# EAGLE board Bottom_PCB_v88 (EAGLE 9.7.0)
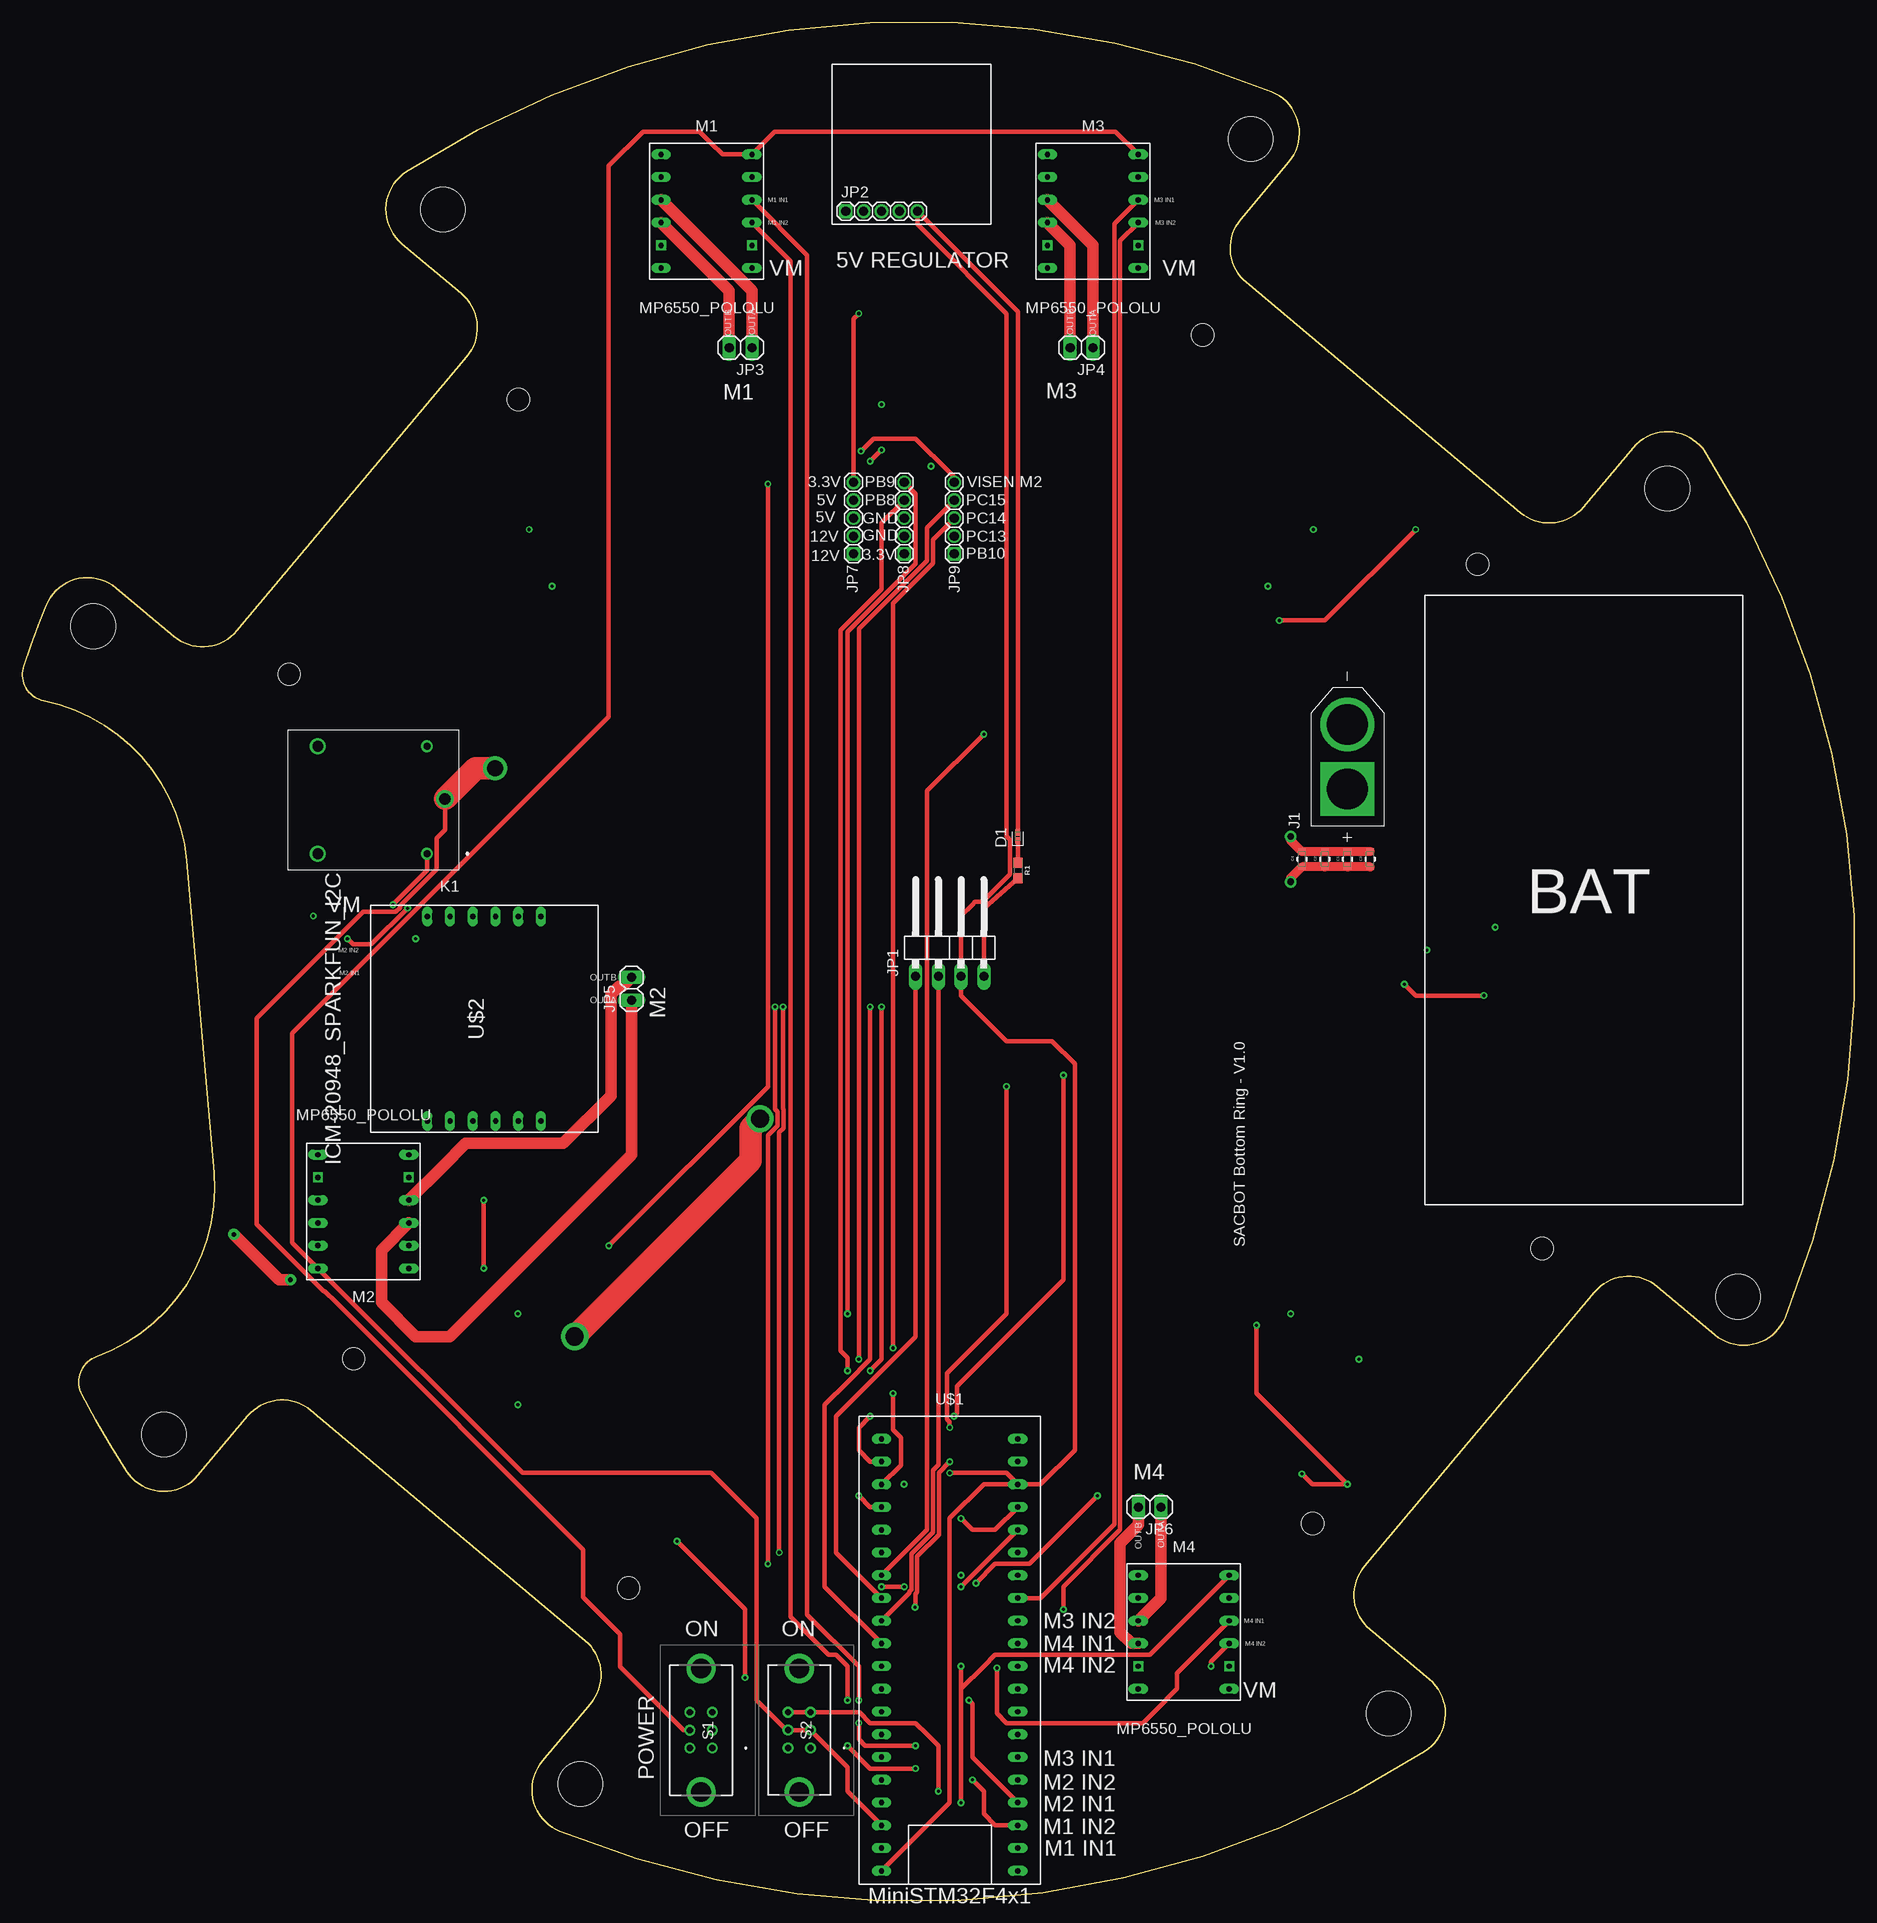
[diagram p0: board, top side]
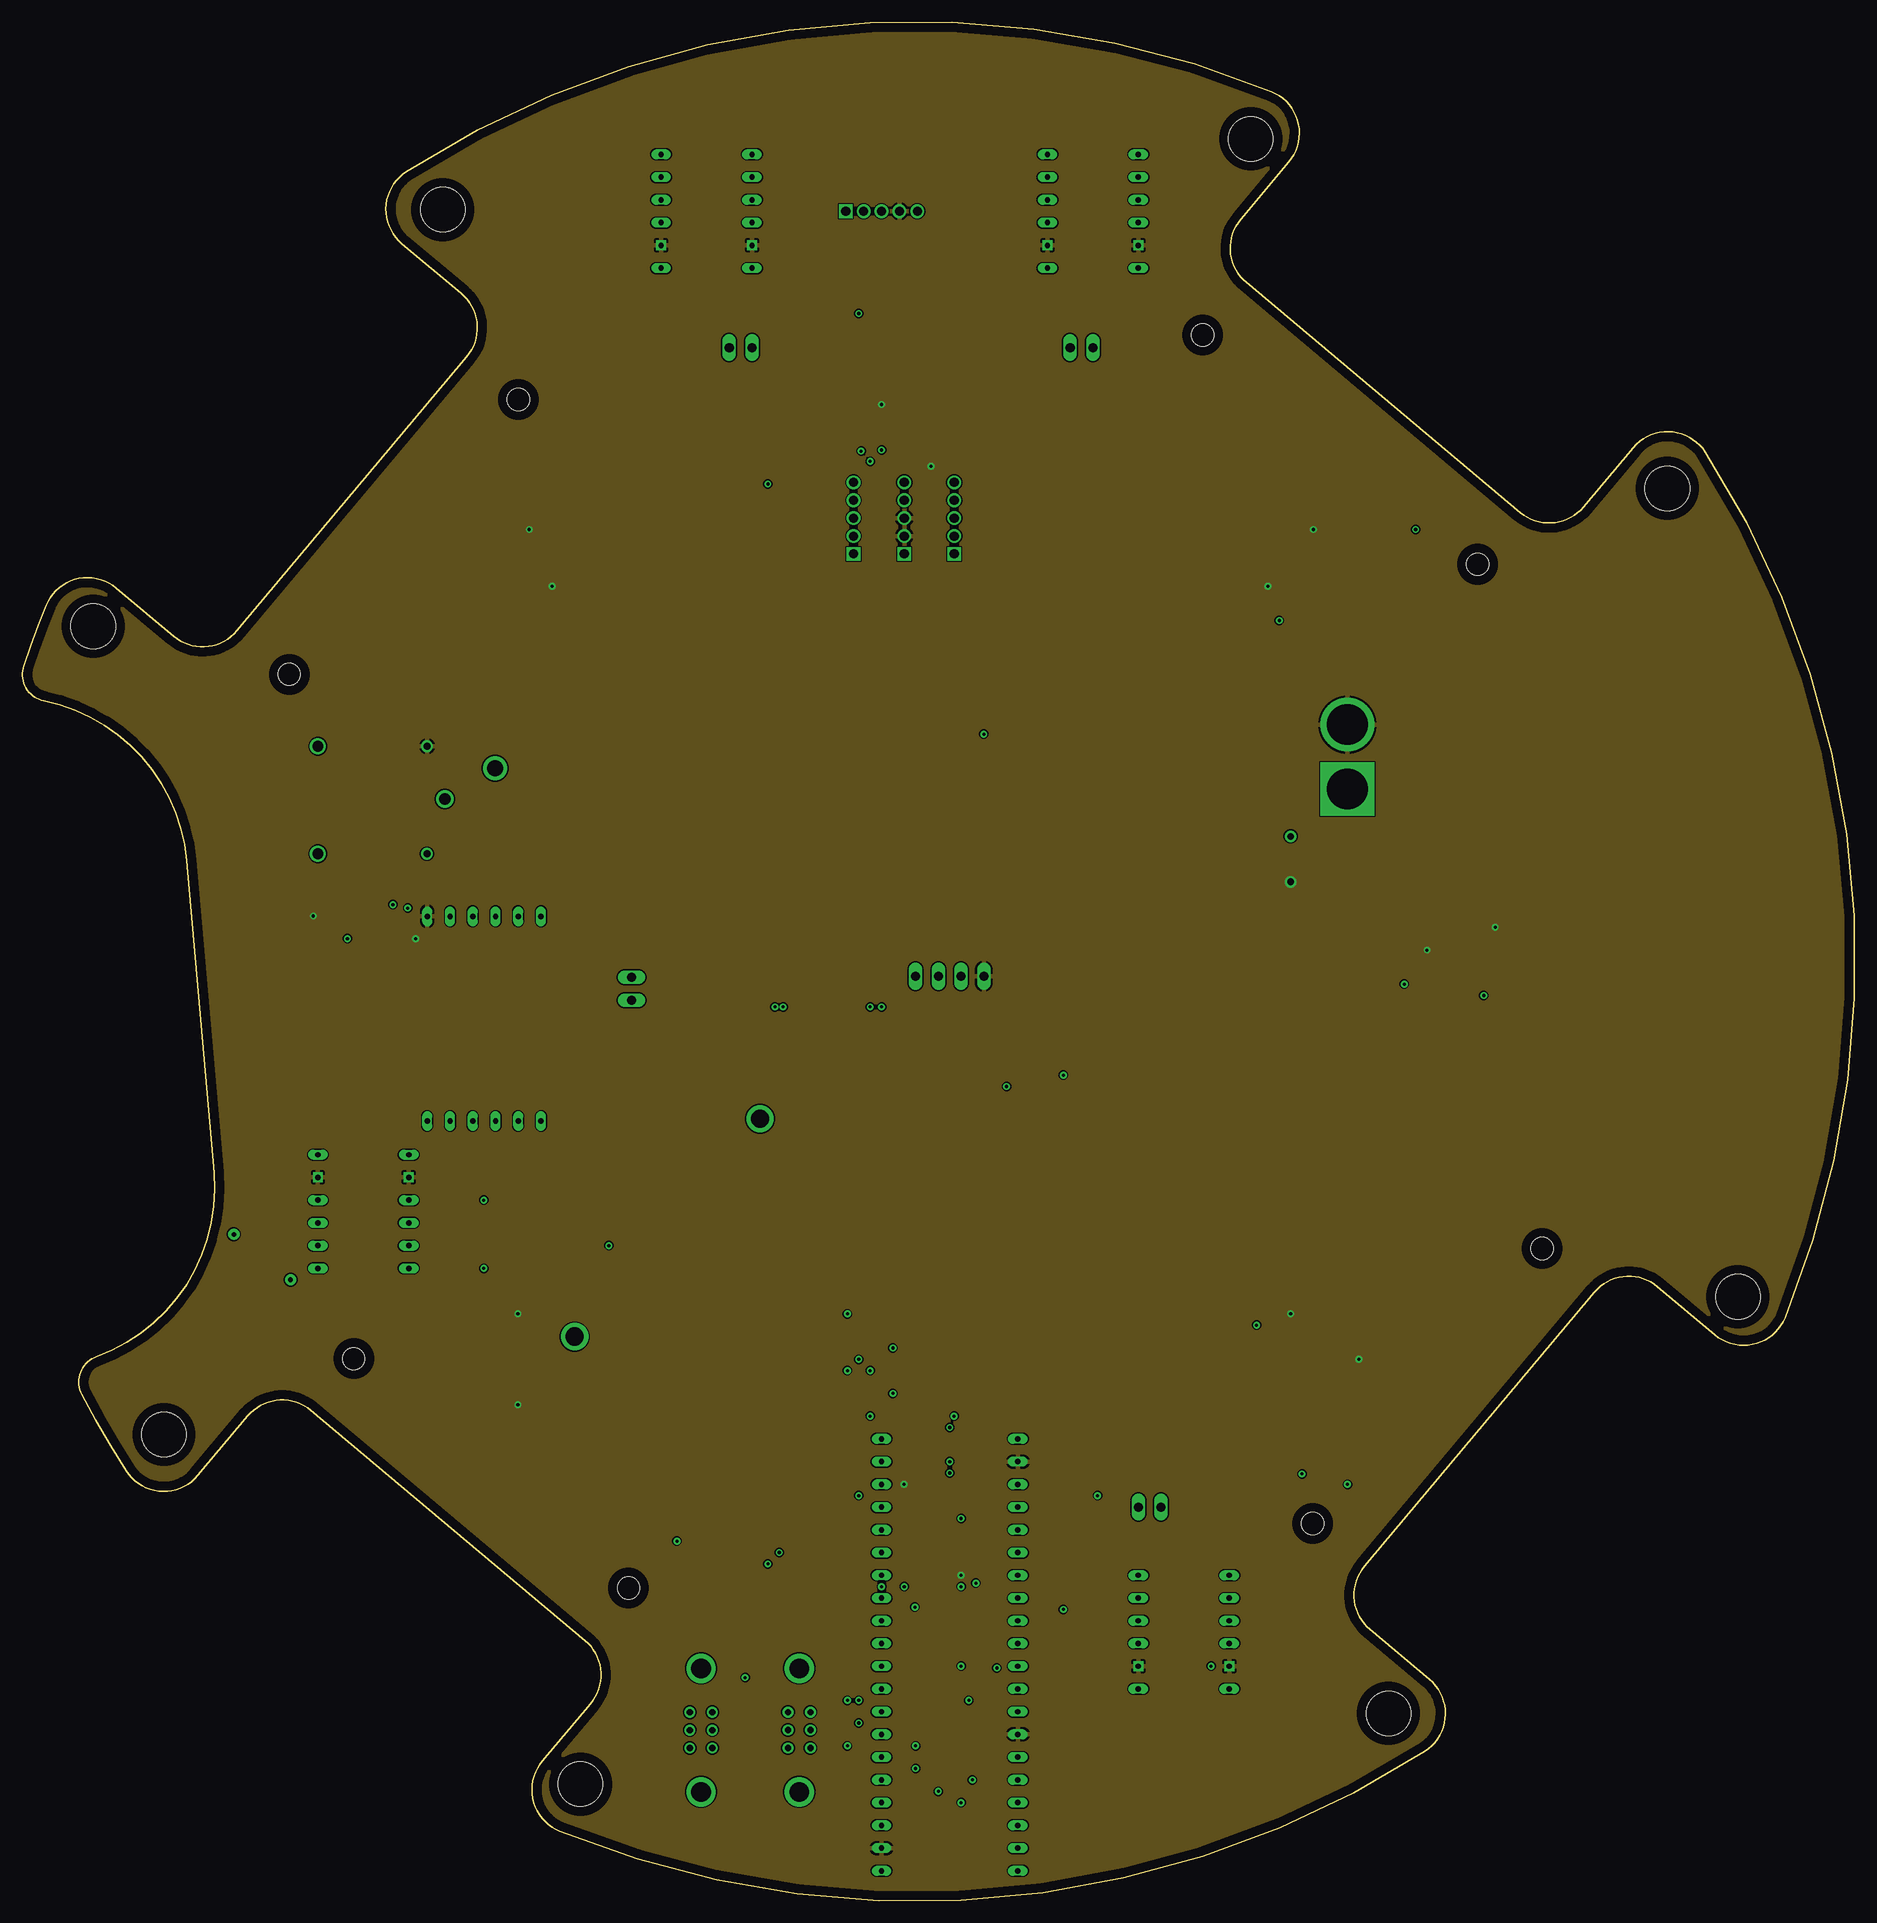
[diagram p1: board, inner layer Route2]
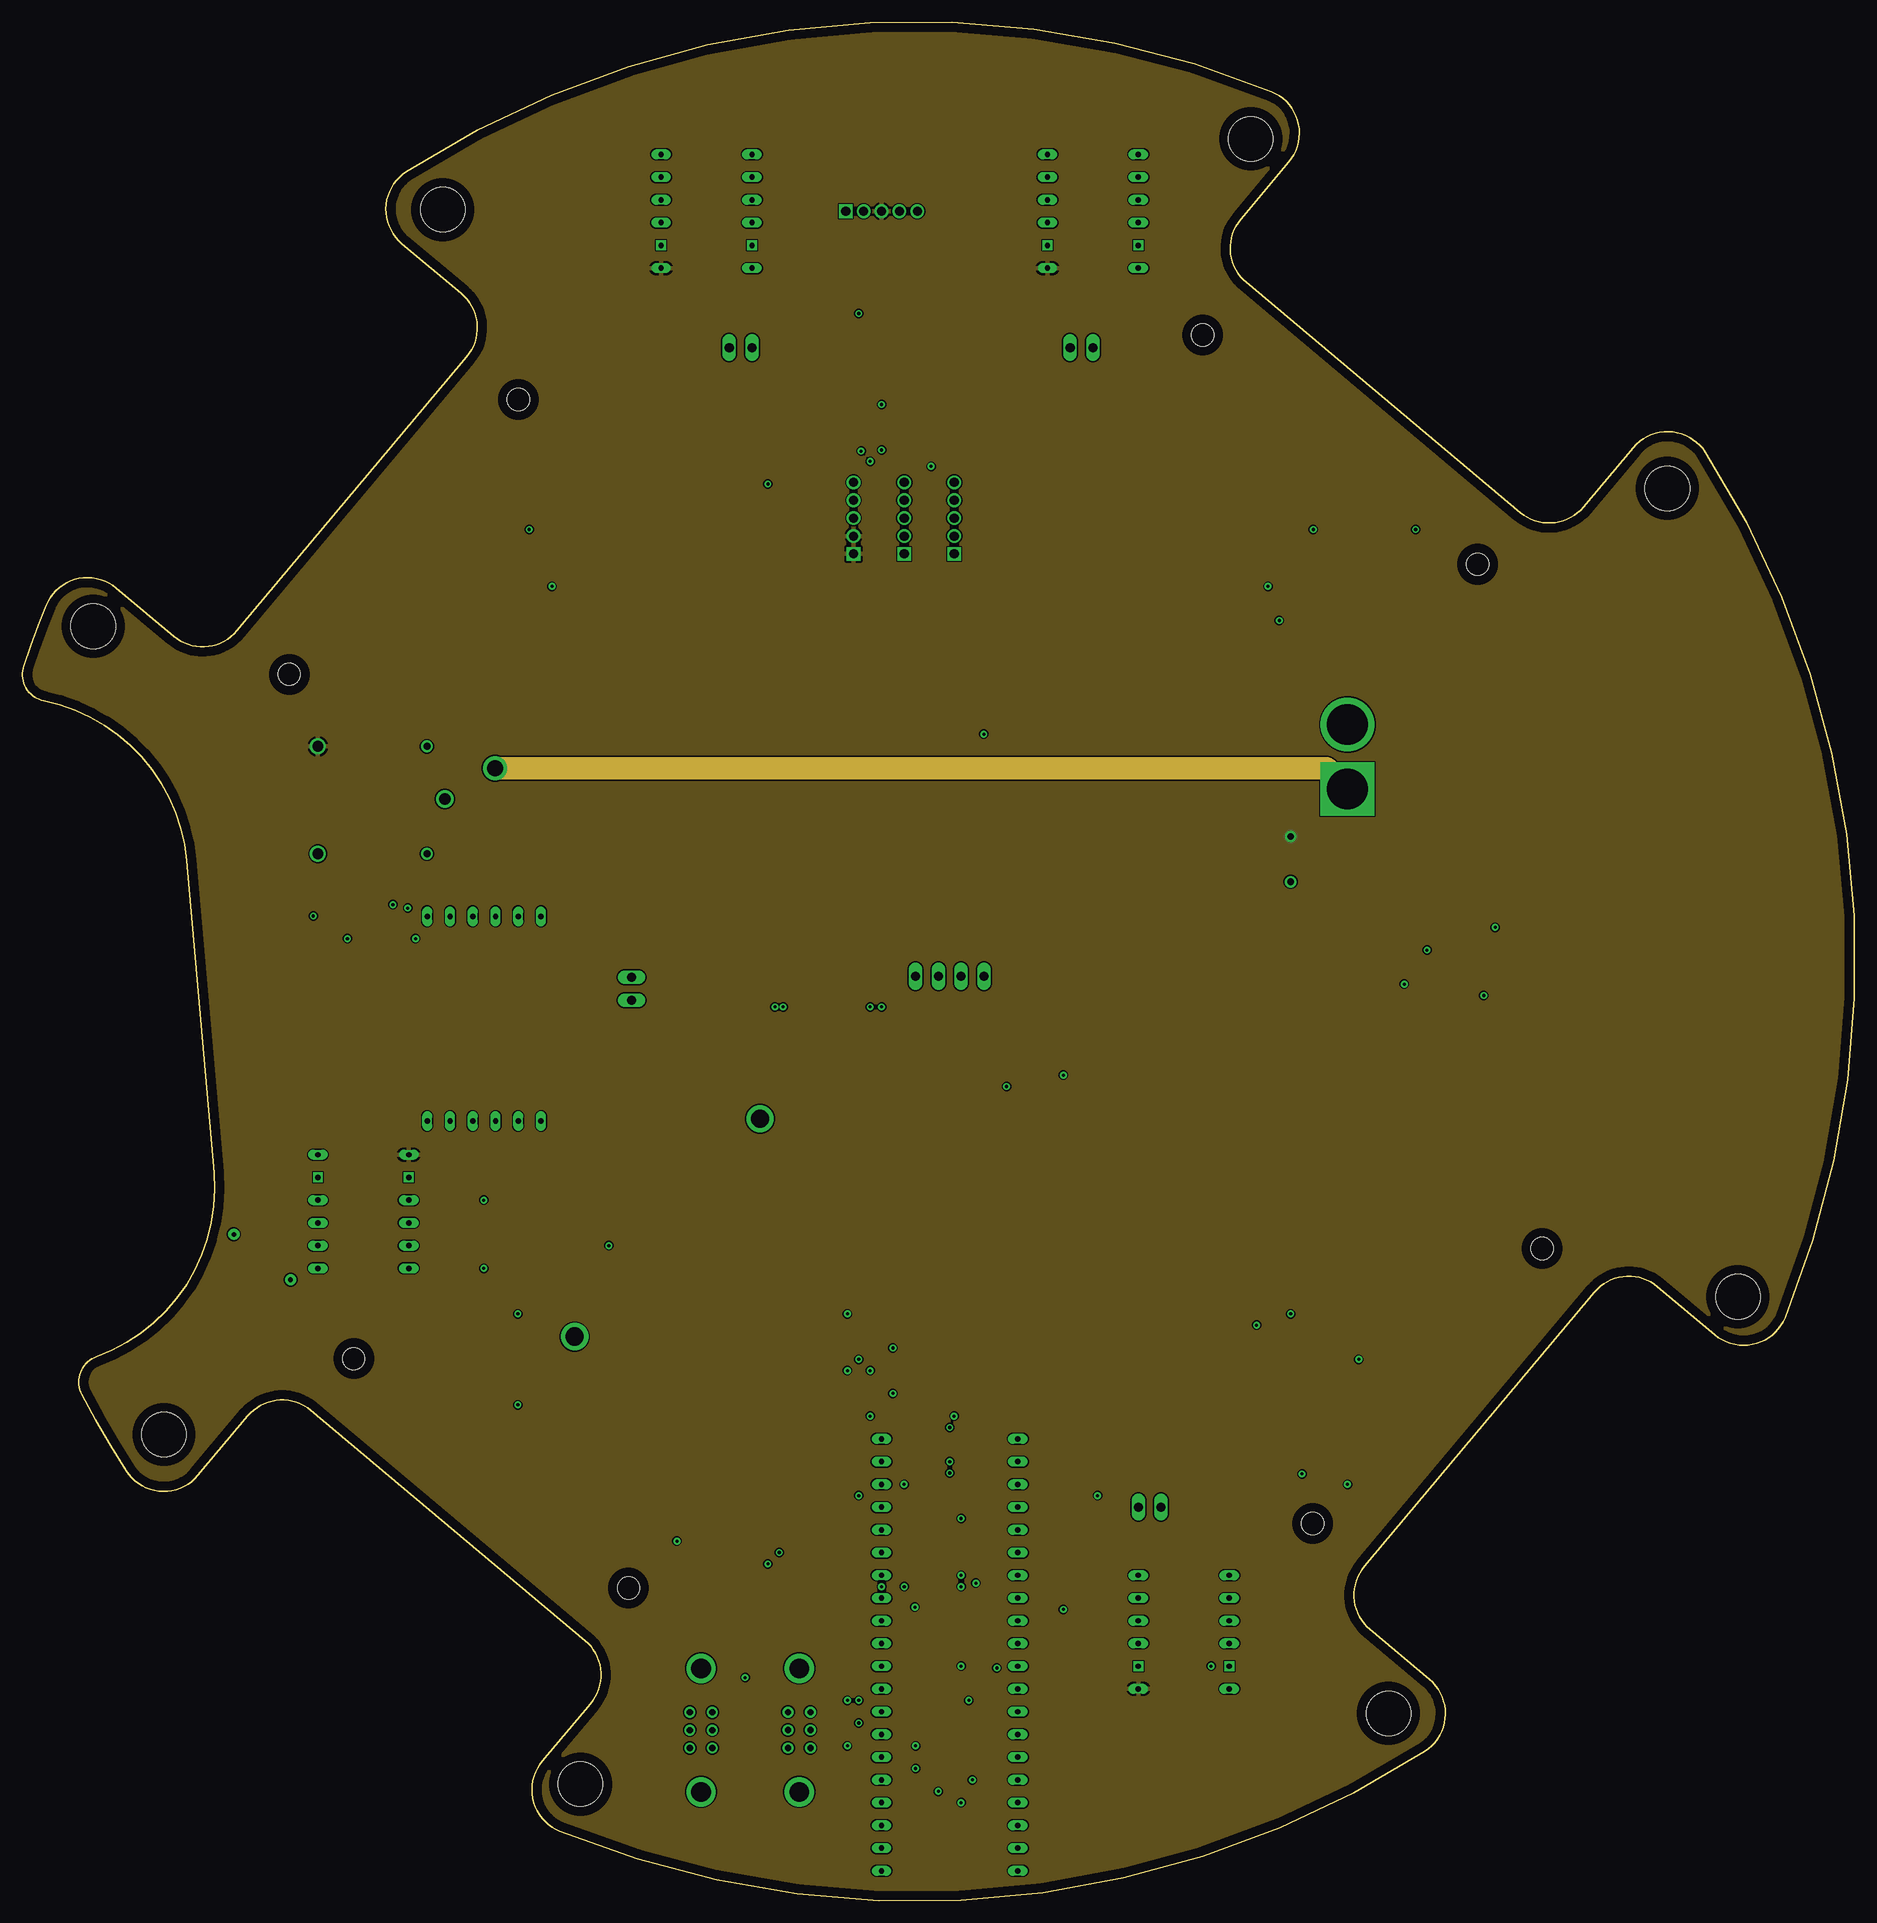
[diagram p2: board, inner layer Route15]
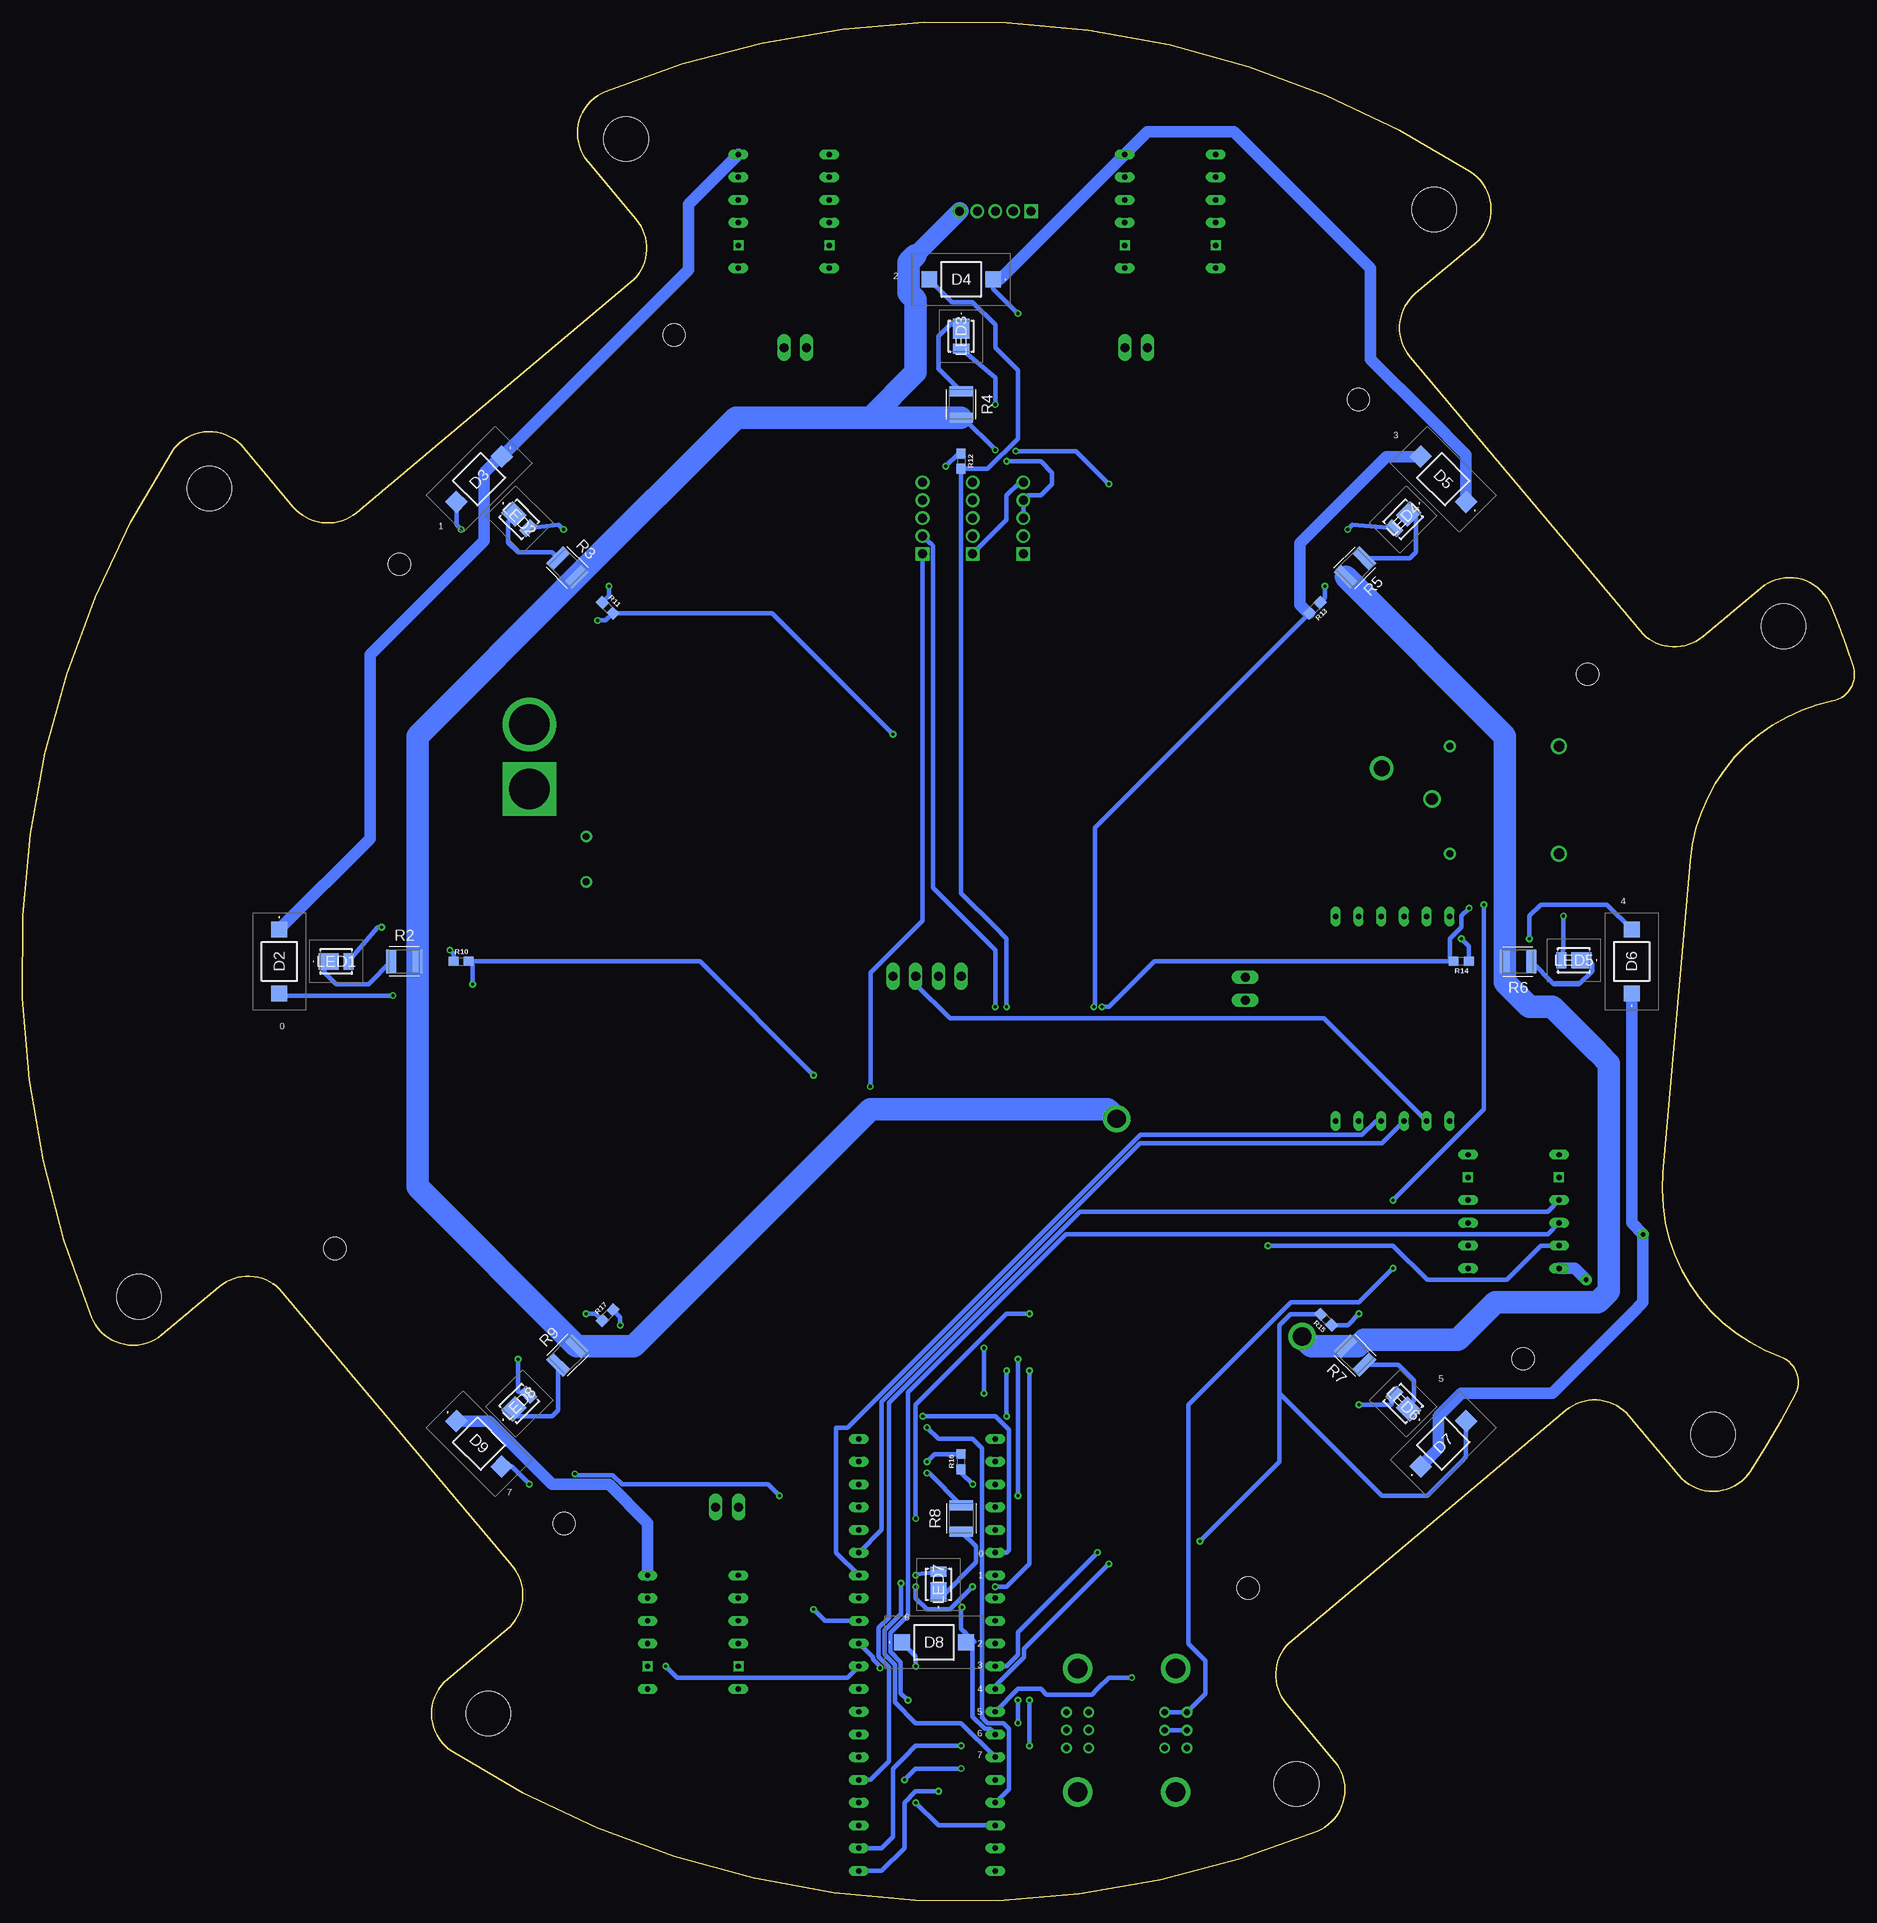
[diagram p3: board, bottom side, seen from below]

Size 204.75 x 209.84 mm. Coordinates in mm from the lower left corner, seen from the top.
Outline: 18.36,116.18 21.41,81.32 arc-75 8.27,60.76 arc98 6.63,56.56 arc5 11.59,48.01 arc107 19.62,47.5 25.2,54.15 arc-90 32.24,54.77 62.88,29.05 arc-90 63.5,22.01 58.11,15.59 arc108 60.05,7.75 arc55 156.74,16.68 arc107 157.24,24.71 150.6,30.29 arc-90 149.98,37.33 175.69,67.98 arc-90 182.74,68.59 189.16,63.2 arc108 197,65.14 arc55 188.07,161.83 arc107 180.03,162.34 174.46,155.69 arc-90 167.41,155.08 136.77,180.79 arc-90 136.16,187.83 141.54,194.25 arc108 139.61,202.09 arc55 42.92,193.16 arc107 42.41,185.13 49.06,179.55 arc-90 49.67,172.51 23.96,141.87 arc-90 16.92,141.25 10.5,146.64 arc108 2.65,144.7 arc4 0.15,137.93 arc97 2.4,134.04 arc-74 18.36,116.18
Copper layers (1+2*15+16): Top 0.035mm / dielectric 1.5mm / Route2 0.035mm / dielectric 0.15mm / Route15 0.035mm / dielectric 0.2mm / Bottom 0.035mm
Design rules "default *": minimum track width 6mil, minimum drill 0.35mm, track to track 6mil, track to pad 6mil, pad to pad 6mil, via to via 6mil, smd to smd 6mil, copper to edge 40mil, drill to drill 6mil, minimum pad ring 10mil, minimum via ring 8mil, stop-mask expansion 4mil, vias tented up to drill 0mil, thermal gap 10mil
Holes 2.5 mm at 131.91,174.93 37.03,60.54 169.83,72.84 55.44,167.72 162.63,149.3 67.74,34.91 144.21,42.12 29.82,137
Holes 5 mm at 152.67,20.92 62.37,13.02 7.92,142.38 15.82,52.07 191.73,67.46 183.83,157.77 46.98,188.92 137.28,196.82

## Footprints (pad centres in the part's own frame; a part is rotated, then mirrored left to right if it is on the bottom)
WCAP-CSGP_0603_W = smd 0.7 x 0.8: 1 -0.85,0; 2 0.85,0
LEDC1005X25N_FLAT-G = smd 0.7 x 0.5: A 0.45,0; C -0.45,0
VBPW34S = smd 1.75 x 1.8: 1 -3.575,0; 2 3.575,0
AMASS_XT60-M = drill 4.55 pad 6: N 3.6,0 | drill 4.55 pad 6 square: P -3.6,0
1X04/90 = drill 1.016 long: 1 -3.81,-3.81; 2 -1.27,-3.81; 3 1.27,-3.81; 4 3.81,-3.81
1_05X2MM = drill 1.016 pad 1.3 square: 1 -4,0 | drill 1.016 pad 1.3: 2 -2,0; 3 0,0; 4 2,0; 5 4,0
1X02 = drill 1.016 long: 1 -1.27,0; 2 1.27,0
RELAY_SRD-12VDC-SL-C = drill 0.8: COIL1 -6.1,6; COIL2 -6.1,-6 | drill 1.3: COM -8.1,-0.12 | drill 1.2: NC 6.1,6; NO 6.1,-6
JE2835ARDN0001A0000N0000001 = smd 2.2 x 1.8: 1 -0.845,0 | smd 1.1 x 1.8: 2 1.395,0
MP6550_POLOLU = drill 0.6 long: !SLEEP -5.08,-6.35; IN1 -5.08,-1.27; IN2 -5.08,1.27; ISET 5.08,-3.81; OUT1 5.08,-1.27; OUT2 5.08,1.27; V3P3 5.08,-6.35; VIN 5.08,6.35; VISEN -5.08,-3.81; VM -5.08,6.35 | drill 0.6 square: GND -5.08,3.81; GND_1 5.08,3.81
0603 = smd 1.1 x 1: 1 -0.85,0; 2 0.85,0
RESC3224X71 = smd 1.131 x 2.66: 1 -1.47,0; 2 1.47,0
SSSF021500 = drill 0.7 pad 1.2: 1 0,0; 2 2,0; 3 4,0; 4 0,2.5; 5 2,2.5; 6 4,2.5 | drill 2.19 pad 3.285: MH1 -4.9,1.25; MH2 8.9,1.25
MINISTM32F4X1 = drill 0.6 long: 3V3 7.62,17.78; 3V3_1 -7.62,-25.4; 5V 7.62,22.86; 5V_1 -7.62,-20.32; GND 7.62,20.32; GND_1 -7.62,-22.86; NRST 7.62,-15.24; PA0 7.62,-12.7; PA1 7.62,-10.16; PA2 7.62,-7.62; PA3 7.62,-5.08; PA4 7.62,-2.54; PA5 7.62,0; PA6 7.62,2.54; PA7 7.62,5.08; PA8 -7.62,12.7; PA9 -7.62,10.16; PA10 -7.62,7.62; PA11 -7.62,5.08; PA12 -7.62,2.54; PA15 -7.62,0; PB0 7.62,7.62; PB1 7.62,10.16; PB2 7.62,12.7; PB3 -7.62,-2.54; PB4 -7.62,-5.08; PB5 -7.62,-7.62; PB6 -7.62,-10.16; PB7 -7.62,-12.7; PB8 -7.62,-15.24; PB9 -7.62,-17.78; PB10 7.62,15.24; PB12 -7.62,22.86; PB13 -7.62,20.32; PB14 -7.62,17.78; PB15 -7.62,15.24; PC13 7.62,-22.86; PC14 7.62,-20.32; PC15 7.62,-17.78; VBAT 7.62,-25.4
ICM-20948_SPARKFUN_I2C = drill 0.6 long: ACL 11.43,-5.08; AD0 -11.43,-5.08; ADA 11.43,-2.54; CL -11.43,-2.54; DA -11.43,0; FSNC 11.43,0; GND 11.43,5.08; GND_1 -11.43,5.08; INT 11.43,2.54; NC -11.43,-7.62; VIN 11.43,-7.62; VIN_1 -11.43,2.54

## Placement (x,y rotation side)
C1  100nF  [WCAP-CSGP_0603_W]  148.09,116.35 90 top
C2  100nF  [WCAP-CSGP_0603_W]  145.55,116.35 90 top
C3  100nF  [WCAP-CSGP_0603_W]  150.63,116.35 90 top
C4  100nF  [WCAP-CSGP_0603_W]  143.01,116.35 90 top
D1  LED_GREEN  [LEDC1005X25N_FLAT-G]  111.26,118.89 90 top
D2  VBPW34S  [VBPW34S]  176.03,104.92 270 bottom
D3  VBPW34S  [VBPW34S]  153.71,158.8 225 bottom
D4  VBPW34S  [VBPW34S]  99.83,181.12 180 bottom
D5  VBPW34S  [VBPW34S]  45.95,158.8 135 bottom
D6  VBPW34S  [VBPW34S]  24.9,104.92 90 bottom
D7  VBPW34S  [VBPW34S]  45.95,51.04 45 bottom
D8  VBPW34S  [VBPW34S]  102.87,28.85 0 bottom
D9  VBPW34S  [VBPW34S]  153.71,51.04 315 bottom
J1  XT60-M  [AMASS_XT60-M]  148.09,127.78 90 top
JP1  PINHD-1X4/90  [1X04/90]  103.64,107.08 0 top
JP2  PINHD-1X55X2MM  [1_05X2MM]  96.02,188.74 0 top
JP3  PINHD-1X2  [1X02]  80.27,173.5 180 top
JP4  PINHD-1X2  [1X02]  118.37,173.5 180 top
JP5  PINHD-1X2  [1X02]  68.08,101.87 90 top
JP6  PINHD-1X2  [1X02]  125.99,43.96 180 top
JP7  PINHD-1X55X2MM  [1_05X2MM]  92.88,154.45 90 top
JP8  PINHD-1X55X2MM  [1_05X2MM]  98.56,154.45 90 top
JP9  PINHD-1X55X2MM  [1_05X2MM]  104.15,154.45 90 top
K1  SRD-12VDC-SL-C  [RELAY_SRD-12VDC-SL-C]  39.12,122.95 180 top
LED1  JE2835ARD-N-0001A0000-N0000001  [JE2835ARDN0001A0000N0000001]  169.68,104.92 0 bottom
LED2  JE2835ARD-N-0001A0000-N0000001  [JE2835ARDN0001A0000N0000001]  149.22,154.31 315 bottom
LED3  JE2835ARD-N-0001A0000-N0000001  [JE2835ARDN0001A0000N0000001]  99.83,174.77 270 bottom
LED4  JE2835ARD-N-0001A0000-N0000001  [JE2835ARDN0001A0000N0000001]  50.44,154.31 225 bottom
LED5  JE2835ARD-N-0001A0000-N0000001  [JE2835ARDN0001A0000N0000001]  31.37,105.05 180 bottom
LED6  JE2835ARD-N-0001A0000-N0000001  [JE2835ARDN0001A0000N0000001]  50.44,55.53 135 bottom
LED7  JE2835ARD-N-0001A0000-N0000001  [JE2835ARDN0001A0000N0000001]  102.37,35.32 90 bottom
LED8  JE2835ARD-N-0001A0000-N0000001  [JE2835ARDN0001A0000N0000001]  149.22,55.53 45 bottom
M1  MP6550_POLOLU  [MP6550_POLOLU]  76.46,188.74 180 top
M2  MP6550_POLOLU  [MP6550_POLOLU]  38.11,76.98 0 top
M3  MP6550_POLOLU  [MP6550_POLOLU]  119.64,188.74 180 top
M4  MP6550_POLOLU  [MP6550_POLOLU]  129.8,29.99 180 top
R1  1k  [0603]  111.26,115.08 270 top
R2  20  [RESC3224X71]  162.06,104.92 0 bottom
R3  20  [RESC3224X71]  143.83,148.92 315 bottom
R4  20  [RESC3224X71]  99.83,167.15 270 bottom
R5  20  [RESC3224X71]  55.82,148.92 225 bottom
R6  20  [RESC3224X71]  37.6,104.92 180 bottom
R7  20  [RESC3224X71]  55.82,60.92 135 bottom
R8  20  [RESC3224X71]  99.83,42.69 90 bottom
R9  20  [RESC3224X71]  143.83,60.92 45 bottom
R10  1k  [0603]  155.71,104.92 0 bottom
R11  1k  [0603]  139.34,144.43 315 bottom
R12  1k  [0603]  99.83,160.8 270 bottom
R13  1k  [0603]  60.31,144.43 225 bottom
R14  1k  [0603]  43.95,104.92 180 bottom
R15  1k  [0603]  59.04,64.9 135 bottom
R16  1k  [0603]  99.83,49.04 90 bottom
R17  1k  [0603]  139.34,65.41 45 bottom
S1  SSSF021500  [SSSF021500]  77.09,17.04 90 top
S2  SSSF021500  [SSSF021500]  88.07,17.04 90 top
U$1  MINISTM32F4X1  [MINISTM32F4X1]  103.64,26.18 180 top
U$2  ICM-20948_SPARKFUN_I2C  [ICM-20948_SPARKFUN_I2C]  50.34,98.52 90 top

## Library data of the parts
C1-C4 = Wurth_Capacitors_WCAP-CSGP; CERAMIC-TYPE: X7R Class II; DATASHEET-URL: https://www.we-online.com/redexpert/spec/885012206120?ae; DF: 5%; HEIGHT: 0.8mm; MOUNT: SMT; OPERATING-TEMPERATURE: -55 up to +125 °C; PART-NUMBER: 885012206120; QMIN: -; RISO: 1GOhm; SIZE: 0603; TECHNICAL-REFERENCE: X7R0603104K100DFCT10000; VR: 100V(DC)
D1 = LED; CATEGORY: LED; COLOR: GREEN; DESCRIPTION: CHIP LED FLAT; SUB-CATEGORY: CHIP; TYPE: FLAT_TOP
D2-D9 = VBPW34S; DESCRIPTION: Photodiode PIN Chip 940nm 2-Pin SMD T/R; HEIGHT: 1.4mm; MANUFACTURER_NAME: Vishay; MANUFACTURER_PART_NUMBER: VBPW34S; MOUSER_PART_NUMBER: 782-VBPW34S; MOUSER_PRICE-STOCK: https://www.mouser.co.uk/ProductDetail/Vishay-Semiconductors/VBPW34S?qs=Uj7aA%252BCqp8ZDwjFKEZ8K8A%3D%3D
J1 = XT60-M; AVAILABILITY: Not in stock; CHECK_PRICES: https://www.snapeda.com/parts/XT60-M/AMASS/view-part/?ref=eda; DESCRIPTION: Plug; DC supply; XT60; male; PIN: 2; for cable; soldered; 30A; 500V; MF: AMASS; MP: XT60-M; PACKAGE: Package; PRICE: None; SNAPEDA_LINK: https://www.snapeda.com/parts/XT60-M/AMASS/view-part/?ref=snap
JP1 = Connector; CATEGORY: Headers; DESCRIPTION: Header, Right Angle, 4 Position; MANUFACTURER: Generic; MPN: Generic; OPERATING_TEMPERATURE: Generic; PART_STATUS: Active; PITCH: 0.100" (2.54mm); ROHS_COMPLIANCE: Generic; SERIES: Generic; SUB-CATEGORY: Headers, Male Pins; TYPE: Board to Board or Cable, Unshrouded, Through Hole, Right Angle
JP2 JP7-JP9 = Connector; CATEGORY: Headers; DESCRIPTION: Header, Straight, 5 Position; MANUFACTURER: Generic; MPN: Generic; OPERATING_TEMPERATURE: Generic; PART_STATUS: Active; PITCH: 0.079" (2.00mm); ROHS_COMPLIANCE: Generic; SERIES: Generic; SUB-CATEGORY: Headers, Male Pins; TYPE: Board to Board or Cable, Unshrouded, Through Hole, Straight
JP3-JP6 = Connector; CATEGORY: Headers; DESCRIPTION: Header, Straight, 2 Position; MANUFACTURER: Generic; MPN: Generic; OPERATING_TEMPERATURE: Generic; PART_STATUS: Active; PITCH: 0.100" (2.54mm); ROHS_COMPLIANCE: Generic; SERIES: Generic; SUB-CATEGORY: Headers, Male Pins; TYPE: Board to Board or Cable, Unshrouded, Through Hole, Straight
K1 = SRD-12VDC-SL-C; AVAILABILITY: In Stock; CHECK_PRICES: https://www.snapeda.com/parts/SRD-12VDC-SL-C/Songle+Relay/view-part/?ref=eda; DESCRIPTION: General Purpose Non Latching 12VDC SPDT Through Hole Relays RoHS; MF: Songle Relay; MP: SRD-12VDC-SL-C; PACKAGE: NON STANDARD-5 Songle Relay; PRICE: None; SNAPEDA_LINK: https://www.snapeda.com/parts/SRD-12VDC-SL-C/Songle+Relay/view-part/?ref=snap
LED1-LED8 = JE2835ARD-N-0001A0000-N0000001; DESCRIPTION: LED Lighting Color J Red-Orange 615nm (610nm ~ 620nm) 1411 (3528 Metric); HEIGHT: 0.8mm; MANUFACTURER_NAME: CREE LED; MANUFACTURER_PART_NUMBER: JE2835ARD-N-0001A0000-N0000001; MOUSER_PART_NUMBER: 941-JE2835ARDN01AN; MOUSER_PRICE-STOCK: https://www.mouser.co.uk/ProductDetail/Cree-LED/JE2835ARD-N-0001A0000-N0000001?qs=tlsG%2FOw5FFi%2FF9M49gTwyg%3D%3D
M1-M4 = MP6550_POLOLU
R1 R10-R17 = SparkFun-Resistors; PROD_ID: RES-07856
R2-R9 = Resistor; CATEGORY: Resistor; SUB-CATEGORY: Fixed
S1 S2 = SSSF021500; DESCRIPTION: 8.5(H)mm, 2mm-travel Type Large-size general purpose Type; HEIGHT: 14.5mm; MANUFACTURER_NAME: ALPS Electric; MANUFACTURER_PART_NUMBER: SSSF021500; MOUSER_PART_NUMBER: 688-SSSF021500; MOUSER_PRICE-STOCK: https://www.mouser.co.uk/ProductDetail/Alps-Alpine/SSSF021500?qs=fMKjfF2mFoj202onwSDRyQ%3D%3D
U$1 = MiniSTM32F4x1
U$2 = ICM-20948_SPARKFUN

## Nets
0: D2.2 R10.2 U$1.PA0
1: D3.2 R11.2 U$1.PA1
2: D4.2 R12.2 U$1.PA4
3: D5.2 R13.2 U$1.PA5
4: D6.2 R14.2 U$1.PA6
5: D7.2 R15.2 U$1.PA7
6: D8.2 R16.2 U$1.PB0
7: D9.2 R17.2 U$1.PB1
+3.3V: D2.1 D3.1 D4.1 D5.1 D6.1 D7.1 D8.1 D9.1 JP7.5 JP8.1 M1.!SLEEP M2.!SLEEP M3.!SLEEP M4.!SLEEP S2.2 S2.5 U$1.3V3
+5V: D1.A JP1.3 JP2.5 JP7.3 JP7.4 R2.2 R3.2 R4.2 R5.2 R6.2 R7.2 R8.2 R9.2 U$1.5V U$1.5V_1 U$2.VIN_1
+12V: J1.P K1.COM S1.2 S1.5
EN: JP2.2
GND: C1.1 C2.1 C3.1 C4.1 J1.N JP1.4 JP2.4 JP8.2 JP8.3 K1.COIL2 LED1.2 LED2.2 LED3.2 LED4.2 LED5.2 LED6.2 LED7.2 LED8.2 M1.GND M1.GND_1 M2.GND M2.GND_1 M3.GND M3.GND_1 M4.GND M4.GND_1 R1.2 R10.1 R11.1 R12.1 R13.1 R14.1 R15.1 R16.1 R17.1 U$1.GND U$1.GND_1 U$1.PA10 U$2.GND
IMU_SCL: U$1.PB6 U$2.CL
IMU_SDA: U$1.PB7 U$2.DA
M1_IN1: M1.IN1 U$1.PB13
M1_IN2: M1.IN2 U$1.PB14
M1_OUT1: JP3.1 M1.OUT1
M1_OUT2: JP3.2 M1.OUT2
M2_IN1: M2.IN1 U$1.PB15
M2_IN2: M2.IN2 U$1.PA8
M2_OUT1: JP5.1 M2.OUT1
M2_OUT2: JP5.2 M2.OUT2
M3_IN1: M3.IN1 U$1.PB5
M3_IN2: M3.IN2 U$1.PB4
M3_OUT1: JP4.1 M3.OUT1
M3_OUT2: JP4.2 M3.OUT2
M4_IN1: M4.IN1 U$1.PB3
M4_IN2: M4.IN2 U$1.PA15
M4_OUT1: JP6.1 M4.OUT1
M4_OUT2: JP6.2 M4.OUT2
N$1: D1.C R1.1
N$2: LED1.1 R2.1
N$3: LED2.1 R3.1
N$4: U$2.AD0
N$5: LED3.1 R4.1
N$6: LED4.1 R5.1
N$7: LED5.1 R6.1
N$8: LED6.1 R7.1
N$9: LED7.1 R8.1
N$10: LED8.1 R9.1
PB8: JP8.4 U$1.PB8
PB9: JP8.5 U$1.PB9
PB10: JP9.1 U$1.PB10
PC13: JP9.2 U$1.PC13
PC14: JP9.3 U$1.PC14
PC15: JP9.4 U$1.PC15
PG: JP2.1
RX2: JP1.2 U$1.PA3
SWD: S2.3 S2.6 U$1.PB12
SWP: K1.COIL1 S1.3 S1.6
TX2: JP1.1 U$1.PA2
VCC: C1.2 C2.2 C3.2 C4.2 JP2.3 JP7.1 JP7.2 K1.NO M1.VIN M2.VIN M3.VIN M4.VIN
VISEN_1: JP9.5 M2.VISEN

## Tracks (layer width: path | path; a pad name or v marks a point on that pad's centre or on a via)
0  (via drill 0.35)
  Top 0.508: v163.33,101.11 155.71,101.11 v154.44,102.38 | v116.34,92.22 116.34,69.36 104.42,57.45 104.42,54.42 v104.12,54.12
  Bottom 0.508: D2.2 175.79,101.11 v163.33,101.11 | v154.44,102.38 154.44,104.5 R10.2 129.04,104.92 v116.34,92.22 | U$1.PA0 94.75,38.88 94.5,39.12 94.5,52.61 96.02,54.12 v104.12,54.12
1  (via drill 0.35)
  Top 0.508: v155.71,153.18 145.55,143.02 v140.47,143.02 | U$1.PA1 101.1,41.42 101.1,106.19 101.1,123.97 v107.45,130.32
  Bottom 0.508: D3.2 156.24,153.71 v155.71,153.18 | v140.47,143.02 139.55,143.02 R11.2 120.96,143.83 v107.45,130.32
2  (via drill 0.35)
  Top 0.508: v94.75,99.84 94.75,60.47 92.21,57.93 89.67,55.39 89.67,36.34 89.67,35.07 U$1.PA4
  Bottom 0.508: D4.2 100.86,178.58 98.56,178.58 96.02,176.04 96.02,174.77 96.02,173.5 93.48,170.96 93.48,163.34 96.87,159.95 R12.2 99.83,112.54 96.02,108.73 94.75,107.46 v94.75,99.84
3  (via drill 0.35)
  Top 0.508: v84.59,38.88 84.59,85.83 85.04,86.28 85.04,88.42 85.01,88.45 v85.01,99.84
  Bottom 0.508: v84.59,38.88 93.48,29.99 93.48,27.45 94.75,26.18 U$1.PA5 | v85.01,99.84 84.89,99.96 84.89,119.86 R13.2
  Bottom 1.27: D5.2 52.31,161.33 59.19,154.45 61.98,151.66 61.98,144.8 61.02,143.83 R13.2
4  (via drill 0.35)
  Top 0.508: v36.33,107.46 36.96,106.83 39.01,106.83 v43.06,110.88 | v43.06,110.88 | v83.32,37.61 83.32,85.49 84.38,86.55 84.38,88.15 84.1,88.43 v84.1,99.84
  Bottom 0.508: D6.2 27.67,111.27 35.06,111.27 36.33,110 v36.33,107.46 | v83.32,37.61 92.82,28.11 92.82,27.18 96.02,23.98 U$1.PA6 | v43.06,110.88 43.95,110 43.95,108.73 45.22,107.46 45.22,105.34 R14.2 78.24,104.92 83.32,99.84 v84.1,99.84
5  (via drill 0.35)
  Top 0.508: v73.16,40.15 80.78,32.53 v80.78,24.91
  Bottom 0.508: D7.2 43.42,49.57 43.95,49.04 47.76,45.23 52.84,45.23 64.27,56.66 | 64.27,56.66 64.27,59.2 64.27,64.28 63.05,65.5 R15.2 | 64.27,56.66 64.27,49.04 v73.16,40.15 | v80.78,24.91 83.32,24.91 84.59,23.64 85.22,23.01 88.4,23.01 90.3,23.01 90.94,23.64 93.48,23.64 U$1.PA7
6  (via drill 0.35)
  Top 0.508: v103.64,49.04 102.42,47.82 102.42,40.87 100,38.46 100,34.47 99.83,34.3 99.83,32.85 v99.75,32.77
  Bottom 0.508: D8.2 99.3,29.86 99.83,30.4 | 99.83,30.4 98.36,28.92 98.56,28.72 98.56,20.55 97.18,19.17 96.63,19.17 U$1.PB0 | v103.64,49.04 102.79,49.89 R16.2 | 99.83,30.4 99.83,32.69 v99.75,32.77
7  (via drill 0.35)
  Top 0.508: v137.93,64.28 137.93,56.66 v148.09,46.5 144.17,46.5 v143.01,47.67 | v106.56,35.45 108.72,37.61 112.53,37.61 v120.15,45.23
  Bottom 0.508: R17.2 137.93,65.2 v137.93,64.28 | v148.09,46.5 150.1,48.51 D9.2 | U$1.PB1 99.83,19.83 104.91,19.83 107.24,22.17 107.24,26.36 108.39,27.51 108.39,30.19 106.56,32.02 v106.56,35.45 | v120.15,45.23 121.42,46.5 137.72,46.5 138.77,47.54 142.88,47.54 v143.01,47.67
+3.3V  (via drill 0.35, 0.51 pad 1.27)
  Top 0.508: M3.!SLEEP 122.18,197.63 85.86,197.63 84.08,197.63 M1.!SLEEP 78.24,195.09 76.97,196.36 75.7,197.63 69.35,197.63 65.54,193.82 65.54,132.25 30.18,96.89 30.18,73.48 M2.!SLEEP 55.89,47.77 75.7,47.77 76.97,47.77 82.05,42.69 82.05,22.37 85.37,19.04 S2.5 S2.2 92.21,14.91 92.21,12.21 U$1.3V3 | M4.!SLEEP 125.99,27.45 122.18,27.45 108.72,27.45 107.45,26.18 104.91,23.64 | 104.91,23.64 v104.91,10.94 | v104.91,26.18 104.91,23.64 | JP7.5 92.88,176.71 v93.48,177.31
  Top 1.27: v23.63,74.44 28.71,69.36 v29.98,69.36
  Bottom 0.508: v104.91,10.94 102.37,8.4 U$1.3V3 | D8.1 104.91,27.31 v104.91,26.18 | v93.48,177.31 96.25,180.09 D4.1 | JP8.1 94.75,154.26 94.75,156.99 93.29,158.45 JP7.5
  Bottom 1.27: D5.1 43.42,161.54 47.76,165.88 54.11,172.23 54.11,174.77 54.11,182.39 65.54,193.82 69.35,197.63 76.97,197.63 79,197.63 M1.!SLEEP 95.51,181.12 D4.1 | M3.!SLEEP 130.31,189.5 130.31,182.39 130.31,182.2 D3.1 151.37,161.33 153.17,159.53 153.17,151.91 155.71,149.37 165.87,139.21 165.87,131.59 165.87,118.66 D2.1 | D9.1 152.61,53.57 149.36,50.31 145.55,46.5 139.2,46.5 134.88,42.18 M4.!SLEEP | D6.1 24.9,75.71 v23.63,74.44 23.63,66.82 24.9,65.55 33.79,56.66 37.6,56.66 43.95,56.66 46.49,54.12 46.49,50.5 D7.1 | v29.98,69.36 31.25,70.63 M2.!SLEEP
+5V  (via drill 0.35, 2.03 pad 2.54)
  Top 0.508: U$1.5V 103.64,10.94 103.64,42.69 107.45,46.5 U$1.5V_1 | U$1.5V_1 113.8,46.5 117.61,50.31 117.61,93.49 115.07,96.03 109.99,96.03 104.91,101.11 JP1.3 104.91,110 106.18,111.27 106.48,111.58 107.27,111.58 110.35,114.66 110.35,118.53 109.99,118.89 109.99,176.04 109.99,177.31 101.1,186.2 100.02,187.28 JP2.5 111.26,177.5 D1.A | v103.64,47.77 109.99,47.77 U$1.5V_1 | v94.75,160.8 v96.02,162.07
  Top 2.54: v61.73,63.01 81.39,82.67 81.39,86.29 v82.45,87.35
  Bottom 0.508: U$2.VIN_1 59.28,98.57 101.1,98.57 104.91,102.38 JP1.3 | R8.2 103.44,47.77 v103.64,47.77 | JP7.3 JP7.4 92.34,156.99 90.94,156.99 89.67,158.26 89.67,159.53 90.94,160.8 v94.75,160.8 | v96.02,162.07 99.63,165.68 R4.2
  Bottom 2.032: JP2.5 104.91,183.85
  Bottom 2.54: R4.2 109.99,165.68 | 109.99,165.68 125,165.68 R3.2 160.59,130.09 R2.2 160.59,79.75 R9.2 136.44,61.96 109.99,88.41 83.51,88.41 v82.45,87.35 | v61.73,63.01 60.67,61.96 R7.2 55.52,61.96 54.83,62.64 44.32,62.64 41.41,65.55 40.14,66.82 32.52,66.82 28.71,66.82 27.44,68.09 27.44,93.49 28.71,94.76 33.79,99.84 36.33,99.84 39.07,102.58 R6.2 39.07,130.09 R5.2 | 109.99,165.68 104.91,170.76 104.91,178.84 105.7,179.63 105.7,183.06 104.91,183.85
+12V  (via drill 1.78 pad 2.54)
  Top 0.508: K1.COM 47.22,119.62 46.28,118.68 46.28,115.21 42.19,111.12 42.19,110.95 41.73,110.49 38.08,110.49 26.17,98.57 26.17,75.58 33.65,68.09 33.79,68.09 35.06,66.82 62.68,39.19 62.68,33.87 66.81,29.75 66.81,26.12 73.9,19.04 S1.5
  Top 2.54: K1.COM 50.66,126.51 v52.84,126.51
  Route15 2.54: v52.84,126.51 145.76,126.51 J1.P
  Bottom 0.508: S1.5 S1.2
GND  (via drill 0.35, 0.76 pad 1.27)
  Top 0.508: R1.2 107.45,110.85 JP1.4
  Top 1.016: C3.1 C1.1 C2.1 C4.1 141.74,114.23 v141.74,113.81
  Bottom 0.508: LED4.2 56.11,153.71 v56.65,153.18 | LED3.2 96.02,170.12 v96.02,167.15 | LED2.2 144.81,153.71 v144.28,153.18 | LED1.2 165.02,108.73 v164.6,108.73 | LED8.2 149.36,56.86 v149.36,60.47 | v104.91,36.34 104.82,36.43 LED7.2 | LED6.2 51.77,55.39 v55.38,55.39 | LED5.2 32.52,106.35 v32.52,110 | R15.1 56.63,64.3 v55.38,65.55 | R14.1 43.1,106.61 v43.95,107.46 | R13.1 59.19,145.56 v59.19,146.83 | R11.1 139.2,145.78 v139.2,146.83 | R10.1 156.56,105.77 v156.98,106.19 | R17.1 140.69,65.55 v141.74,65.55 | R16.1 99.83,47.79 v98.53,46.5 | R12.1 100.15,161.65 v101.56,160.25
  pour Route2: -10.41,-9.13 207.52,-9.13 207.52,222.78 -14.21,222.78
IMU_SCL
  Bottom 0.508: U$2.CL 53.51,87.1 55.03,85.58 57.92,85.58 79.8,85.58 109.99,55.39 112.53,52.85 113.8,52.85 113.8,38.88 U$1.PB6
IMU_SDA
  Bottom 0.508: U$1.PB7 108.72,41.42 108.72,55.73 79.84,84.6 52.84,84.6 U$2.DA
M1_IN1  (via drill 0.35)
  Top 0.508: v99.83,17.29 94.19,17.29 93.48,18 93.48,18.56 v93.48,19.83 | v93.48,22.37 93.48,26.18 87.71,31.95 87.71,183.84 M1.IN1
  Bottom 0.508: v99.83,17.29 104.91,17.29 106.18,16.02 107.45,14.75 107.45,7.13 108.72,5.86 U$1.PB13 | v93.48,22.37 v93.48,19.83
M1_IN2  (via drill 0.35)
  Top 0.508: M1.IN2 85.86,183.15 85.86,31.69 90.1,27.45 90.94,27.45 92.21,26.18 v92.21,22.37 | v99.83,14.75 94.75,14.75 v92.21,17.29 | v106.18,13.48 107.45,12.21 107.45,9.67 108.72,8.4 U$1.PB14
  Bottom 0.508: v99.83,14.75 104.91,14.75 v106.18,13.48 | v92.21,22.37 v92.21,17.29
M1_OUT1
  Top 1.27: M1.OUT1 81.54,179.85 JP3.1
M1_OUT2
  Top 1.27: M1.OUT2 79,179.85 JP3.2
M2_IN1  (via drill 0.35)
  Top 0.508: U$1.PB15 106.18,16.02 106.18,21.97 v105.77,22.37
  Bottom 0.508: M2.IN1 34.3,74.44 88.14,74.44 105.77,56.8 105.77,31.87 107.73,29.92 107.73,27.78 106.58,26.64 106.58,23.18 v105.77,22.37
M2_IN2
  Bottom 0.508: U$1.PA8 109.99,13.48 107.91,15.56 107.91,26.09 109.05,27.23 109.05,30.46 107.91,31.61 107.91,55.6 86.53,76.98 34.3,76.98 M2.IN2
M2_OUT1
  Top 1.27: M2.OUT1 40.14,72.66 40.14,68.09 40.14,66.82 43.95,63.01 47.76,63.01 64.5,79.75 68.08,83.33 JP5.1
M2_OUT2
  Top 1.27: M2.OUT2 47,82.06 49.54,84.6 60.46,84.6 65.77,89.91 65.77,101.24 66.67,102.15 67.09,102.15 JP5.2
M3_IN1
  Top 0.508: M3.IN1 122.03,187.32 122.03,42.03 115.07,35.07 113.8,33.8 U$1.PB5
M3_IN2  (via drill 0.35)
  Top 0.508: M3.IN2 122.69,185.44 122.69,135.4 122.69,41.42 116.34,35.07 v116.34,32.53
  Bottom 0.508: v116.34,32.53 115.07,31.26 U$1.PB4
M3_OUT1
  Top 1.27: M3.OUT1 119.64,184.93 JP4.1
M3_OUT2
  Top 1.27: JP4.2 117.1,175.28 117.1,184.93 M3.OUT2
M4_IN1  (via drill 0.35)
  Top 0.508: M4.IN1 129.04,25.42 129.04,23.64 126.5,21.1 125.23,19.83 109.99,19.83 108.91,20.91 v108.91,25.99
  Bottom 0.508: U$1.PB3 109.71,27.17 109.71,26.96 108.91,26.16 v108.91,25.99
M4_IN2  (via drill 0.35)
  Top 0.508: M4.IN2 132.85,26.69 v132.85,26.18
  Bottom 0.508: v132.85,26.18 131.58,24.91 112.53,24.91 U$1.PA15
M4_OUT1
  Top 1.27: M4.OUT1 127.26,33.8 JP6.1
M4_OUT2
  Top 1.27: M4.OUT2 123.96,28.72 122.69,29.99 122.69,39.95 124.72,41.98 JP6.2
N$1
  Top 0.508: D1.C R1.1
N$2
  Bottom 0.508: R2.1 166.07,102.38 169.68,102.38 171.07,103.78 LED1.1
N$3
  Bottom 0.508: R3.1 145.55,150.64 149.36,150.64 150.44,151.73 150.44,154.02 150.21,154.26 LED2.1
N$5
  Bottom 0.508: R4.1 102.37,171.16 102.37,174.77 100.97,176.17 LED3.1
N$6
  Bottom 0.508: R5.1 49.71,149.96 49.03,150.64 49.03,154.88 LED4.1
N$7
  Bottom 0.508: LED5.1 29.84,105.05 29.32,104.65 29.32,103.85 30.79,102.38 32.52,102.38 33.59,102.38 R6.1
N$8
  Bottom 0.508: LED6.1 49.45,55.58 49.21,55.82 49.21,58.12 50.3,59.2 50.98,59.88 R7.1
N$9
  Bottom 0.508: LED7.1 102.17,33.8 98.19,37.78 98.19,39.59 R8.1
N$10
  Bottom 0.508: R9.1 144.87,54.8 145.55,54.12 149.78,54.12 LED8.1
PB8  (via drill 0.35)
  Top 0.508: JP8.4 96.02,153.91 96.02,146.49 91.42,141.9 91.42,61.42 92.21,60.63 v92.21,59.2 | v96.02,35.07 v98.56,35.07 | v104.91,35.07 U$1.PB8
  Bottom 0.508: v92.21,59.2 92.21,38.88 92.21,37.61 94.75,35.07 v96.02,35.07 | v98.56,35.07 101.1,32.53 103.64,32.53 104.91,33.8 v104.91,35.07
PB9  (via drill 0.35)
  Top 0.508: JP8.5 99.83,157.18 99.83,150.64 99.83,149.37 93.48,143.02 92.21,141.75 v92.21,65.55 | v104.91,42.69 106.18,41.42 108.72,41.42 U$1.PB9
  Bottom 0.508: v92.21,65.55 94.75,65.55 99.83,60.47 104.91,55.39 104.91,49.04 v104.91,42.69
PB10  (via drill 0.35)
  Top 0.508: v109.99,90.95 109.99,65.55 103.34,58.9 103.34,53.8 103.64,53.5 v103.64,52.85
  Bottom 0.508: JP9.1 104.15,109.49 109.99,103.65 v109.99,90.95 | v103.64,52.85 102.37,51.58 98.56,51.58 97.53,50.55 97.53,21.1 97.53,20.46 97.16,20.08 96.91,19.83 95.13,19.83 94.5,19.21 94.5,13.48 94.5,12.45 U$1.PB10
PC13  (via drill 0.35)
  Top 0.508: v96.02,99.84 96.02,60.47 v94.75,59.2 | v94.75,54.12 93.48,52.85 93.48,51.58 93.48,50.31 94.75,49.04 U$1.PC13
  Bottom 0.508: JP9.2 103.31,151.62 103.22,151.62 102.98,151.38 102.98,113.15 99.83,110 96.02,106.19 v96.02,99.84 | v94.75,59.2 v94.75,54.12
PC14  (via drill 0.35)
  Top 0.508: v97.29,56.66 97.29,52.85 97.29,52.6 98.18,51.71 98.18,48.66 U$1.PC14 | JP9.3 101.76,152.06 101.76,149.43 97.29,144.96 v97.29,61.74
  Bottom 0.508: v97.29,61.74 v97.29,56.66
PC15  (via drill 0.35)
  Top 0.508: JP9.4 101.1,153.4 101.1,149.71 93.48,142.09 v93.48,60.47 | v93.48,45.23 94.75,43.96 U$1.PC15
  Bottom 0.508: v93.48,60.47 v93.48,45.23
RX2
  Top 0.508: JP1.2 102.37,48.7 101.76,48.09 101.76,41.15 99.34,38.73 99.34,34.75 99.17,34.57 99.17,34.41 U$1.PA3
SWD  (via drill 0.35)
  Top 0.508: S2.6 S2.3 93.53,21.04 94.75,19.83 98.56,19.83 99.83,19.83 101.1,18.56 102.37,17.29 v102.37,12.21
  Bottom 0.508: v102.37,12.21 104.91,12.21 106.18,10.94 106.18,9.67 106.18,5.86 108.72,3.32 U$1.PB12
SWP  (via drill 0.35)
  Top 0.508: K1.COIL1 45.22,115.08 v41.41,111.27 | v51.57,78.25 v51.57,70.63
  Bottom 0.508: S1.3 S1.6 72.53,23.11 72.53,25.09 72.53,26.79 74.43,28.69 74.43,55.39 73.16,56.66 63,66.82 61.73,66.82 55.38,66.82 v51.57,70.63 | v41.41,111.27 41.41,90.95 41.41,88.41 45.22,84.6 v51.57,78.25
TX2
  Top 0.508: JP1.1 99.83,63.01 90.94,54.12 90.94,38.88 U$1.PA2
VCC  (via drill 0.76 pad 1.27)
  Top 1.016: C3.2 C1.2 C2.2 C4.2 141.74,118.47 v141.74,118.89
  pour Route15: -10.41,-9.13 207.52,-9.13 207.52,222.78 -14.21,222.78
VISEN_1  (via drill 0.35)
  Top 0.508: v65.54,73.17 83.32,90.95 v83.32,158.26 | v93.73,161.94 95.13,163.34 96.02,163.34 99.83,163.34 103.61,159.56 104.15,159.02 JP9.5
  Bottom 0.508: M2.VISEN 35.06,73.17 38.87,69.36 47.76,69.36 51.57,73.17 v65.54,73.17 | v83.32,158.26 87,161.94 v93.73,161.94

## Text on the board
tPlace: M1 IN1 | M3 IN1 | M1 IN2 | M3 IN2 | VM | VM | 5V REGULATOR | OUTB | OUTA | OUTB | OUTA | M1 | M3 | 3.3V | PB9 | VISEN M2 | 5V | PB8 | PC15 | 5V | GND | PC14 | 12V | GND | PC13 | 12V | 3.3V | PB10 | VM | BAT | M2 IN2 | OUTB | M2 IN1 | OUTA | M2 | SACBOT Bottom Ring - V1.0 | M4 | OUTB | OUTA | M4 IN1 | ON | ON | M3 IN2 | M4 IN2 | M4 IN1 | M4 IN2 | VM | M3 IN1 | POWER | M2 IN2 | M2 IN1 | OFF | OFF | M1 IN2 | M1 IN1
bPlace: 2 | 3 | 1 | 4 | 0 | 5 | 7 | 0 | 1 | 6 | 2 | 3 | 4 | 5 | 6 | 7